# Altium PCB PCB_TX.PcbDoc
Units mil, origin at the board's own origin, x right, y up, seen from the top; angles counter-clockwise.
Board outline 2922.35 x 2276.76 mil, 2 copper layers (Top Layer, Bottom Layer); 93 components, 62 nets, 281 pads, 43 vias.
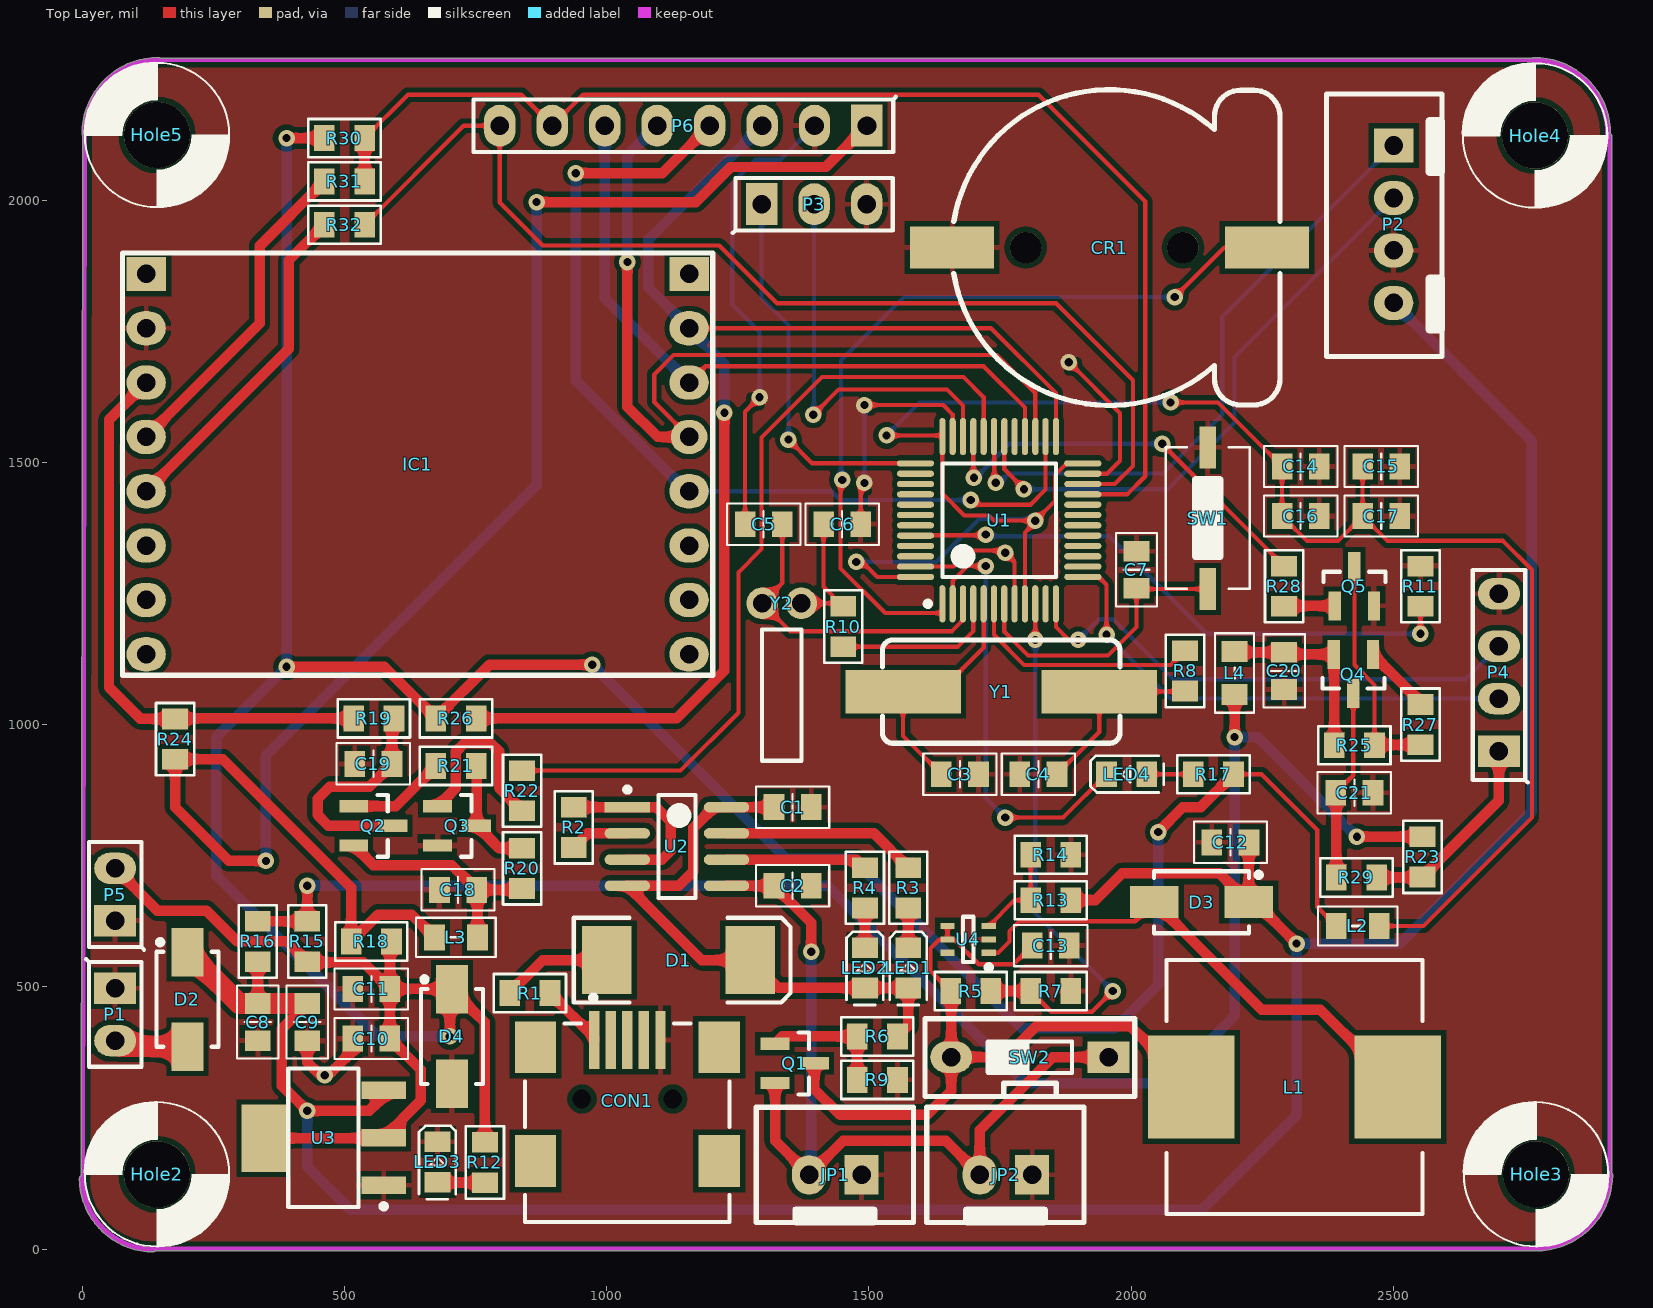
[diagram p0: Top Layer view]
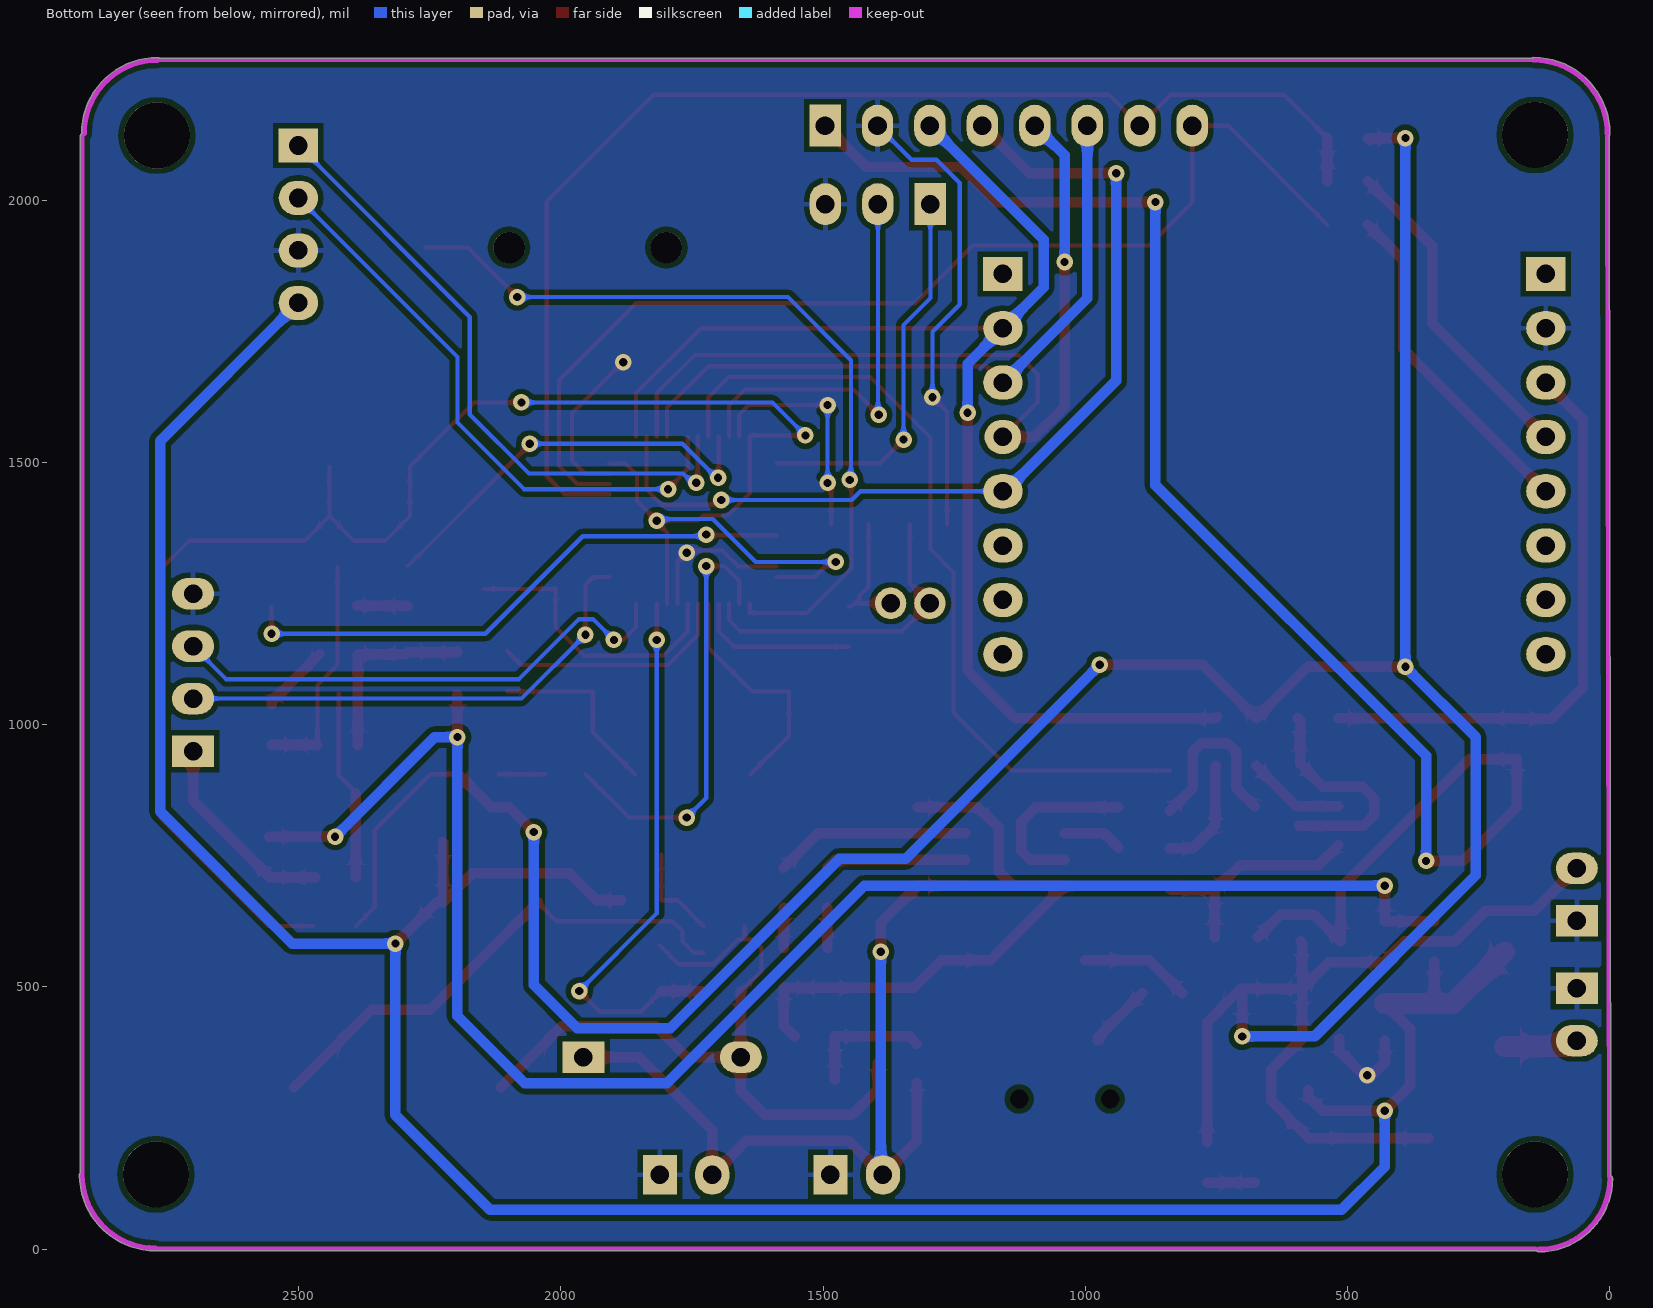
[diagram p1: Bottom Layer view, seen from below]
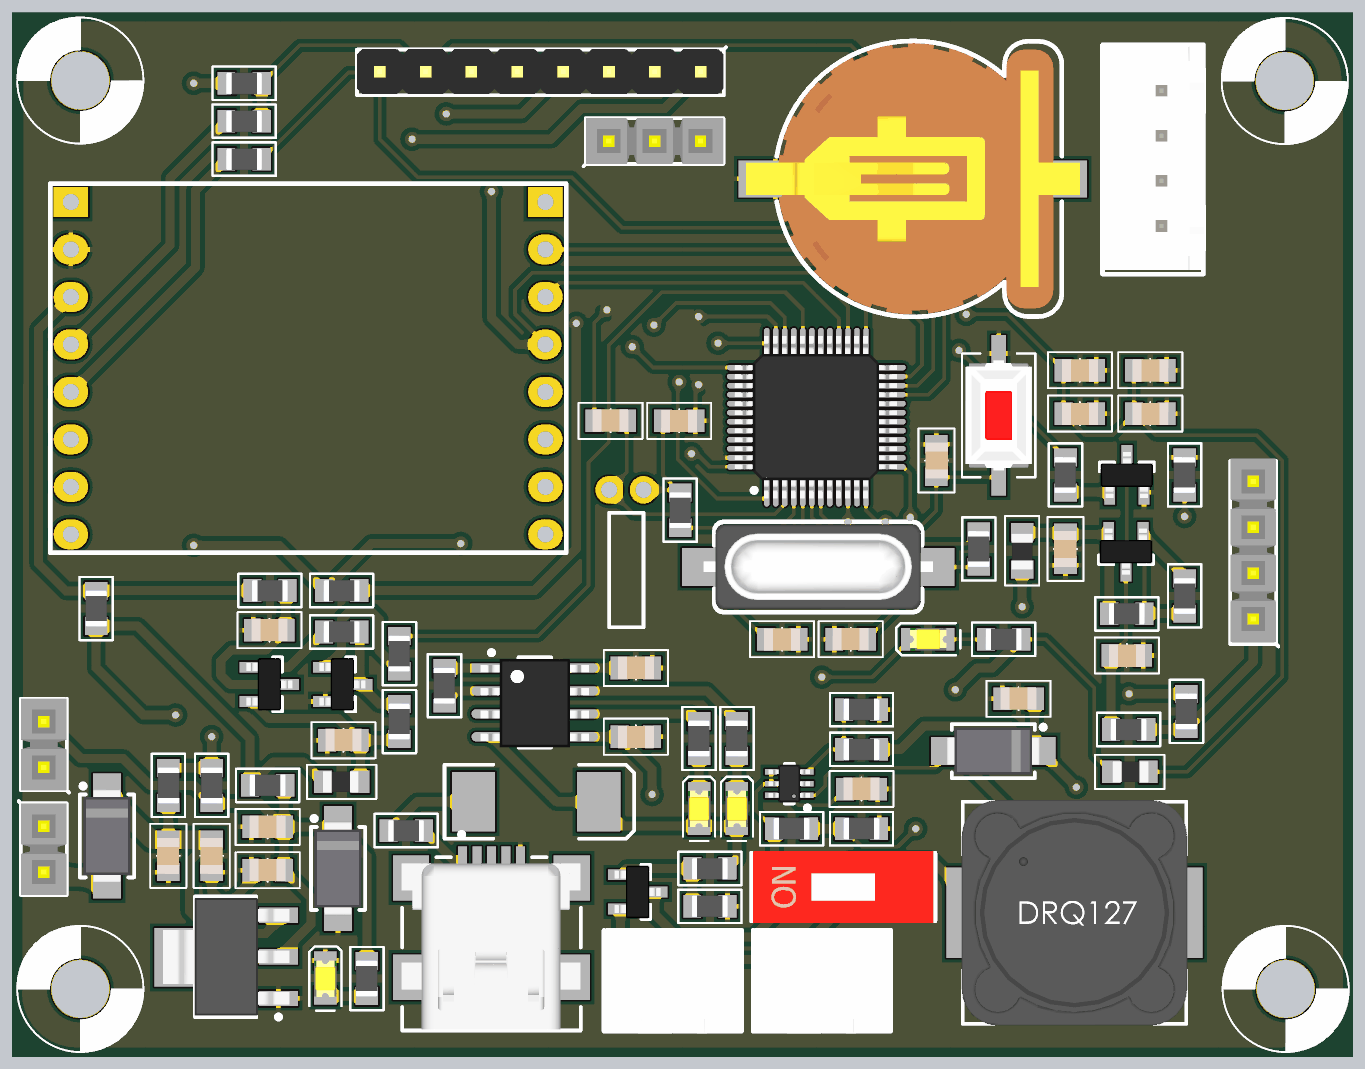
[diagram p2: 3D render of the assembled board from above, using the file's embedded part models]

## Layer stack, top to bottom
Top Solder: solder mask 0.4, Solder Resist, Dk 3.5
Top Layer: signal copper 1.4
Dielectric 1: dielectric 12.6, FR-4, Dk 4.8
Bottom Layer: signal copper 1.4
Bottom Solder: solder mask 0.4, Solder Resist, Dk 3.5

## Board outline
135,-5.01 cw(c135,135) -5.01,135 cw(c0,135) -2.05,139.58 0.91,2121.07 cw(c4.92,2121.06) 1.49,2123.15 cw(c5,2126.73) -0.01,2126.73 cw(c145,2126.73) 145,2271.75 cw(c145,2266.73) 148,2270.75 2765.57,2270.75 cw(c2768.46,2266.65) 2768.46,2271.67 cw(c2768.46,2126.65) 2913.48,2126.65 cw(c2908.46,2126.65) 2913.48,2126.48 cw(c2911.42,2123.03) 2915.43,2123.03 2915.43,145.9 cw(c2912.32,141.97) 2917.34,141.97 cw(c2772.32,141.97) 2772.32,-3.05 cw(c2772.32,1.97) 2771.86,-3.03 cw(c2771.65,0.98) 2771.65,-3.03 141.73,-3.03 cw(c141.73,0.98) 139.45,-2.32 cw(c135,0)

## Design rules (kind name [scope] priority, off if disabled: settings)
Clearance [All] p1: gap=10 ignorepadtopadclearanceinfootprint=FALSE except(0: Arc-Hole Track-Hole SMDPad-Hole THPad-Hole Via-Hole Fill-Hole Poly-Hole Region-Hole Text-Hole; 5: Arc-SMDPad Track-SMDPad SMDPad-SMDPad)
HoleSize [All] p1: absolutevalues=TRUE maxlimit=200 minlimit=1 maxpercent=80.000 minpercent=20.000
MinimumSolderMaskSliver [All] p1: minsoldermaskwidth=0
PolygonConnect [All] p1: thpad.connectstyle=Relief thpad.reliefconductorwidth=10 thpad.reliefentries=4 thpad.polygonreliefangle="90 Angle" thpad.airgapwidth=10 smdpad.connectstyle=Relief smdpad.reliefconductorwidth=10 smdpad.reliefentries=4 smdpad.polygonreliefangle="90 Angle" smdpad.airgapwidth=10 via.connectstyle=Direct via.reliefconductorwidth=10 via.reliefentries=4 via.polygonreliefangle="90 Angle" via.airgapwidth=10
RoutingVias [All] p1: holewidth=15.75 width=31.5 viastyle="Through Hole" minholewidth=15.75 minwidth=31.5 maxholewidth=15.75 maxwidth=31.5
SilkToSilkClearance [All] p1: silktosilkclearance=0
SilkToSolderMaskClearance [IsPad] p1: minsilkscreentomaskgap=0 clearancetoexposedcopper=TRUE
SolderMaskExpansion [All] p1: expansion=4
Width [All] p1: maxlimit=40 minlimit=8 preferedwidth=20
26 further rules are at their usual default settings.

## Components (designator, comment, footprint, x,y, rotation, side; value= is the part's Value field where it differs from the comment)
C1 "10uf" "C 0805 (2012)" 1354.39,842.72 r180 top
C2 "10uf" "C 0805 (2012)" 1354.39,692.91 r0 top
C3 "22pF" "C 0805 (2012)" 1673.29,905.51 r0 top
C4 "22pF" "C 0805 (2012)" 1822.9,905.51 r180 top
C5 "10pF" "C 0805 (2012)" 1299.28,1381.89 r180 top
C6 "10pF" "C 0805 (2012)" 1448.88,1381.89 r0 top
C7 "100nF" "C 0805 (2012)" 2009.91,1295.28 r90 top
C8 "10uF" "C 0805 (2012)" 334.71,433.07 r270 top
C9 "100nf" "C 0805 (2012)" 429.2,433.07 r270 top
C10 "10uF" "C 0805 (2012)" 551.24,401.57 r180 top
C11 "100nF" "C 0805 (2012)" 551.24,496.06 r180 top
C12 "10uf" "C 0805 (2012)" 2189.04,775.59 r180 top
C13 "10uf" "C 0805 (2012)" 1846.52,578.74 r180 top
C14 "100nF" "C 0805 (2012)" 2322.9,1492.13 r0 top
C15 "100nF" "C 0805 (2012)" 2476.44,1492.13 r0 top
C16 "100nF" "C 0805 (2012)" 2322.9,1397.64 r0 top
C17 "10uF" "C 0805 (2012)" 2476.44,1397.64 r0 top
C18 "10uf" "C 0805 (2012)" 716.6,685.04 r180 top
C19 "10uf" "C 0805 (2012)" 555.18,925.2 r180 top
C20 "10uf" "C 0805 (2012)" 2291.4,1102.36 r270 top
C21 "10uf" "C 0805 (2012)" 2425.26,870.08 r0 top
CON1 "USB mini B" "CON USB B Mini" 1039.43,283.46 r270 top
CR1 "" "CON CR1220" 2258.49,1909.45 r180 top
D1 "Diode" SMC 1136.87,551.18 r0 top
D2 "SS34" "DO-214AC (SMA)" 200.85,476.38 r90 top
D3 "SS34" "DO-214AC (SMA)" 2133.92,661.42 r0 top
D4 "SS14" "DO-214AC (SMA)" 704.79,405.51 r90 top
Hole2 "3mm" SCREW/3M/7M 142.72,142.72 r0 top
Hole3 "3mm" SCREW/3M/7M 2771.65,142.72 r0 top (schematic designator Hole2)
Hole4 "3mm" SCREW/3M/7M 2769.68,2123.03 r0 top (schematic designator Hole2)
Hole5 "3mm" SCREW/3M/7M 142.72,2124.02 r0 top (schematic designator Hole2)
IC1 "SX1278m" SX1287m -122.89,1269.17 r0 top
JP1 "JP2" "CON Header 2" 1285.89,141.73 r180 top value="Connector 2"
JP2 "JP2" "CON Header 2" 1611.09,141.73 r180 top value="Connector 2"
L1 "22uH" "Inductor SMD 12x12x8" 2311.09,309.06 r0 top
L2 "600 Ohm" "Inductor SMD 0805 (2012)" 2431.5,616.14 r180 top
L3 "Ferrite 80R" "Inductor SMD 0805 (2012)" 712.66,594.49 r0 top
L4 "Ferrite 80R" "Inductor SMD 0805 (2012)" 2196.91,1098.43 r90 top
LED1 "Led" "Led SMD 0805" 1574.87,535.43 r90 top
LED2 "Led" "Led SMD 0805" 1492.19,535.43 r90 top
LED3 "RedLed" "Led SMD 0805" 677.23,165.35 r90 top
LED4 "Blue Led" "Led SMD 0805" 1992.19,905.51 r180 top
P1 "Header 2" "Header 2" 63.06,497.64 r270 top
P2 "Header 4" "CON Header 4" 2529.06,1904.94 r270 top
P3 "Header 3" "Header 3" 1295.34,1992.13 r0 top
P4 "Header 4" "Header 4" 2700.85,949.61 r90 top
P5 "Header 2" "Header 2" 63.06,625.98 r90 top
P6 "Header 8" "Header 8" 1496.13,2141.73 r180 top
Q1 "FDN340P" SOT-23 1358.33,354.33 r0 top
Q2 "IRLML6402" SOT-23 555.18,807.09 r0 top
Q3 "2SC1815" SOT-23 714.63,807.09 r0 top
Q4 "IRLML6402" SOT-23 2423.29,1096.46 r270 top
Q5 "2SC1815" SOT-23 2425.26,1263.78 r90 top
R1 "0R" "R 0805 (2012)" 853.41,488.19 r0 top
R2 "1k2" "R 0805 (2012)" 937.07,804.13 r270 top
R3 "1k" "R 0805 (2012)" 1574.87,688.98 r270 top
R4 "1k" "R 0805 (2012)" 1492.19,688.98 r270 top
R5 "100k" "R 0805 (2012)" 1693.96,492.13 r180 top
R6 "10k" "R 0805 (2012)" 1515.81,405.51 r0 top
R7 "100k" "R 0805 (2012)" 1846.52,492.13 r180 top
R8 "330" "R 0805 (2012)" 2102.43,1102.36 r270 top
R9 "100k" "R 0805 (2012)" 1515.81,322.83 r180 top
R10 "0" "R 0805 (2012)" 1450.85,1187.01 r90 top
R11 "10k" "R 0805 (2012)" 2551.24,1263.78 r270 top
R12 "4k7" "R 0805 (2012)" 767.78,165.35 r270 top
R13 "220k" "R 0805 (2012)" 1846.52,665.35 r0 top
R14 "30k" "R 0805 (2012)" 1846.52,751.97 r180 top
R15 "R" "R 0805 (2012)" 429.2,586.61 r90 top
R16 "R" "R 0805 (2012)" 334.74,586.61 r90 top
R17 "2k2" "R 0805 (2012)" 2156.56,905.51 r0 top
R18 "R" "R 0805 (2012)" 551.24,586.61 r180 top
R19 "0" "R 0805 (2012)" 556.17,1011.81 r0 top
R20 "10k" "R 0805 (2012)" 838.65,725.98 r270 top
R21 "1k" "R 0805 (2012)" 712.66,921.26 r180 top
R22 "4k7" "R 0805 (2012)" 838.65,874.02 r270 top
R23 "0" "R 0805 (2012)" 2555.18,748.03 r270 top
R24 "0" "R 0805 (2012)" 177.23,972.44 r90 top
R25 "10k" "R 0805 (2012)" 2425.26,960.63 r180 top
R26 "10k" "R 0805 (2012)" 712.66,1011.81 r0 top
R27 "1k" "R 0805 (2012)" 2551.24,1000 r90 top
R28 "4k7" "R 0805 (2012)" 2291.4,1263.78 r270 top
R29 "0" "R 0805 (2012)" 2429.2,708.66 r0 top
R30 "10k" "R 0805 (2012)" 500.06,2118.11 r0 top
R31 "0" "R 0805 (2012)" 500.06,2035.43 r0 top
R32 "0" "R 0805 (2012)" 500.06,1952.76 r0 top
SW1 "Button" SW/2/SMD 2145.73,1393.7 r270 top
SW2 "SW DIP-1" SW/DIP1 1956.76,366.14 r90 top
U1 "STM32F103C8T6" LQFP48_N 1748.09,1389.76 r90 top
U2 "TP4056" SOIC-8 1133.92,767.72 r0 top
U3 "AMS1117-33" SOT-223 460.69,212.6 r180 top
U4 "MT3608" SOT-363-6 1689.04,590.55 r180 top
Y1 "8Mhz" "Crystal HC49US SMD" 1752.03,1062.99 r180 top
Y2 "32.768Khz" "Crystal DIP-2" 1396.13,1231.3 r270 top

## Footprints (in the part's own frame and the unit in brackets; to place one, negate y for a bottom-side part, rotate by r counter-clockwise, add the part's x,y. Pads: shape width x height; smd on the part's side, far side on the other; paste and mask are expansions set on the pad)
"C 0805 (2012)" [mm] "Chip Capacitor, 2-Leads, Body 2.0x1.3mm, IPC Medium Density"
  rect 1x1.25 smd: 1(-0.9,0) 2(0.9,0)
  silkscreen extent -1.78,-1 1.78,1, body extent -1,-0.64 1,0.61, height 0.6
"CON CR1220" [mil]
  rect 160x80 smd: 1(0,0) 2(600,0)
  round 60 hole 60: ""(160,0) ""(460,0)
  silkscreen extent -25,-301 597,301, body extent -64,-295 664,295, height 159
"CON Header 2" [mil]
  rect 65x75 hole 35.43: 1(-200,0)
  oval 65x75 hole 35.43: 2(-100,0)
  silkscreen extent -299,-129 1,96, body extent -297,-134 -2,94, height 286
"CON Header 4" [mil]
  rect 65x75 hole 35.43: 1(-199,-29)
  oval 65x75 hole 35.43: 2(-99,-29) 3(1,-29) 4(101,-29)
  silkscreen extent -297,-157 203,68, body extent -294,-162 195,64, height 290
"CON USB B Mini" [mm] "Connector; USB2.0, Type B, SM; 5 Position; Right Angle"
  rect 2.794x0.5 smd: 1(-2.927,-1.6) 2(-2.927,-0.8) 3(-2.927,0) 4(-2.927,0.8) 5(-2.927,1.6)
  rect 2.5x2 smd: 6(-2.573,4.45) 7(2.927,4.45) 8(-2.573,-4.45) 9(2.927,-4.45)
  round 0.6 hole 0.9 unplated: MH1(-0.073,2.2) MH2(-0.073,-2.2)
  silkscreen extent -5.11,-4.95 5.88,4.95, body extent -3.39,-4.98 5.81,4.92, height 4.17
"Crystal DIP-2" [mil] "Available for crystal 32.768kHz"
  round 60 hole 35.43: 1(0,-25) 2(0,-100)
  silkscreen extent 50,-100 300,-25, body extent 50,-105 300,-25
"Crystal HC49US SMD" [mil]
  rect 220.47x82.67 smd: 1(-187,0) 2(187,0)
  silkscreen extent -226,-98 226,98, body extent -250,-93 250,92, height 165
"DO-214AC (SMA)" [mm] "Molded Diode, 2-Leads, Body 4.3x2.7mm, IPC Medium Density"
  rect 2.35x1.55 smd: 1(-2.286,0) 2(2.286,0)
  silkscreen extent -2.3,-1.5 2.89,1.5, body extent -2.6,-1.3 2.6,1.3, height 2.4
"Header 2" [mil]
  rect 60x80 hole 35.43: 1(0,0)
  oval 60x80 hole 35.43: 2(100,0)
  silkscreen extent -55,-55 150,50, body extent -50,-50 150,50, height 350
"Header 3" [mil]
  rect 60x80 hole 35.43: 1(0,0)
  oval 60x80 hole 35.43: 2(100,0) 3(200,0)
  silkscreen extent -55,-55 250,50, body extent -50,-50 250,50, height 350
"Header 4" [mil]
  rect 60x80 hole 35.43: 1(0,0)
  oval 60x80 hole 35.43: 2(100,0) 3(200,0) 4(300,0)
  silkscreen extent -60,-55 345,50, body extent -50,-50 350,50, height 350
"Header 8" [mil]
  rect 60x80 hole 35.43: 1(0,0)
  oval 60x80 hole 35.43: 2(100,0) 3(200,0) 4(300,0) 5(400,0) 6(500,0) 7(600,0) 8(700,0)
  silkscreen extent -55,-55 750,50, body extent -50,-51 750,47, height 336
"Inductor SMD 12x12x8" [mm] "Precision Wire Wound Inductor, 2-Leads, Body 12.3x12.3mm, IPC Low Density"
  rect 4.2x5 smd: 1(-5,0) 2(5,0)
  silkscreen extent -6.2,-6.15 6.2,6.15, body extent -6.25,-6.25 6.25,6.25, height 8.01
"Inductor SMD 0805 (2012)" [mm] "Precision Wire Wound Inductor, 2-Leads, Body 2.0x1.2mm, IPC Medium Density"
  rect 1x1.25 smd: 1(-1.041,0) 2(1.041,0)
  silkscreen extent -1.92,-0.95 1.92,0.95, body extent -1.05,-0.6 0.95,0.6, height 0.95
"Led SMD 0805" [mm] "Led SMD 0805"
  rect 1x1.25 smd: 1(-0.95,0) 2(1,0)
  silkscreen extent -1.78,-0.89 1.78,0.89, body extent -1.01,-0.62 1.01,0.63, height 1.1
LQFP48_N [mm] "Thin QFP, 48-Leads, Body 7x7mm, Pitch 0.5mm, IPC Medium Density"
  oval 1.8x0.3 smd: 1(-4.05,2.75) 2(-4.05,2.25) 3(-4.05,1.75) 4(-4.05,1.25) 5(-4.05,0.75) 6(-4.05,0.25) 7(-4.05,-0.25) 8(-4.05,-0.75) 9(-4.05,-1.25) 10(-4.05,-1.75) 11(-4.05,-2.25) 12(-4.05,-2.75) 25(4.05,-2.75) 26(4.05,-2.25) 27(4.05,-1.75) 28(4.05,-1.25) 29(4.05,-0.75) 30(4.05,-0.25) 31(4.05,0.25) 32(4.05,0.75) 33(4.05,1.25) 34(4.05,1.75) 35(4.05,2.25) 36(4.05,2.75)
  oval 0.3x1.8 smd: 13(-2.75,-4.05) 14(-2.25,-4.05) 15(-1.75,-4.05) 16(-1.25,-4.05) 17(-0.75,-4.05) 18(-0.25,-4.05) 19(0.25,-4.05) 20(0.75,-4.05) 21(1.25,-4.05) 22(1.75,-4.05) 23(2.25,-4.05) 24(2.75,-4.05) 37(2.75,4.05) 38(2.25,4.05) 39(1.75,4.05) 40(1.25,4.05) 41(0.75,4.05) 42(0.25,4.05) 43(-0.25,4.05) 44(-0.75,4.05) 45(-1.25,4.05) 46(-1.75,4.05) 47(-2.25,4.05) 48(-2.75,4.05)
  silkscreen extent -4.17,-2.75 2.75,3.57, body extent -4.5,-4.47 4.5,4.53, height 1.6
"R 0805 (2012)" [mm] "Chip Resistor, 2-Leads, Body 2.0x1.3mm, IPC Medium Density"
  rect 1x1.25 smd: 1(-0.975,0) 2(0.975,0)
  silkscreen extent -1.75,-0.92 1.75,0.92, body extent -1,-0.61 1,0.59, height 0.5
SCREW/3M/7M [mm]
  round 3.2 hole 3.2: 1(0,0)
  silkscreen extent -3.54,-3.53 3.53,3.54
SMC [mm] "DO-214-AB/SMC; 2 C-Bend Leads; Body 7.9 x 5.9 mm, inc. leads (LxW)"
  rect 2.4x3.3 smd: 1(-3.475,0) 2(3.475,0)
  silkscreen extent -5.07,-2.05 5.43,2.05
SOIC-8 [mm] "SOIC, 8-Leads, Body 5.0x4.0mm (max), Pitch 1.27mm, IPC Medium Density"
  rect 2.2x0.51 smd: 1(-2.4,1.905)
  oval 2.2x0.51 smd: 2(-2.4,0.635) 3(-2.4,-0.635) 4(-2.4,-1.905) 5(2.4,-1.905) 6(2.4,-0.635) 7(2.4,0.635) 8(2.4,1.905)
  silkscreen extent -2.52,-2.5 0.9,2.88, body extent -3,-2.49 3,2.41, height 1.75
SOT-23 [mm] "SOT23, 3-Leads, Body 3.0x2.5mm (max), Pitch 0.95mm, IPC Medium Density"
  rect 1.4x0.6 smd: 1(-0.95,0.95) 2(-0.95,-0.95) 3(0.95,0)
  silkscreen extent 0.2,-1.5 0.7,1.5, body extent -1.28,-1.46 1.27,1.46, height 0.95
SOT-223 [mm] "SOT223, 4-Leads, Body 6.7x7.3mm (max), Pitch 2.30mm, IPC Medium Density"
  rect 2.15x0.85 smd: 1(-2.899,2.3) 2(-2.899,0) 3(-2.899,-2.3)
  rect 2.15x3.25 smd: 4(2.899,0.025)
  silkscreen extent -3.02,-3.35 1.72,3.45, body extent -3.51,-3.25 3.49,3.25, height 1.64
SOT-363-6 [mm] "SOT363 (SC-88, SC-70-6), 6-Leads, Body 2.2x2.2mm (max), Pitch 0.65mm, IPC Medium Density"
  rect 0.7x0.3 smd: 1(-1,0.65) 2(-1,0) 3(-1,-0.65) 4(1,-0.65) 5(1,0) 6(1,0.65)
  silkscreen extent -1.13,-1.1 0.25,1.47, body extent -1.15,-1.05 1.15,1.05, height 1
SW/2/SMD [mil]
  rect 80x31.5 smd: 1(-135,0) 2(135,0)
  silkscreen extent -135,-80 135,80, body extent -120,-73 120,73, height 98
SW/DIP1 [mil]
  rect 60x80 hole 35.43: 1(0,0)
  oval 60x80 hole 35.43: 2(0,300)
  silkscreen extent -75,-50 73,350, body extent -80,-47 77,347, height 269
SX1287m [mil] "SX1287 Module"
  oval 75x65 hole 35.43: 0(245,-135) 1(245,-31.43) 2(245,72.14) 3(245,175.71) 4(245,279.29) 5(245,382.86) 6(245,486.43) 8(1280,-135) 9(1280,-31.43) 10(1280,72.14) 11(1280,175.71) 13(1280,382.86) 14(1280,486.43)
  rect 75x65 hole 35.43: 7(245,590) 15(1280,590)
  oval 70x65 hole 35.43: 12(1280,279.29)
  silkscreen extent 200,-175 1325,630, body extent 195,-180 1330,635, height 10

## Part data
C1 C2 C3 C4 C5 C6 C7 C8 C9 C10 C11 C12 C13 C14 C15 C16 C17 C18 C19 C20 C21: library part "Capacitor NP", "Capacitor non-pol"
CON1: library part "CON USB mini B", "USB mini type B, 5 pins"
CR1: library part Battery
D1: "Default Diode", Code_JEDEC=DO-214-AB, LatestRevisionDate=17-Jul-2002, LatestRevisionNote="Re-released for DXP Platform.", PackageDescription="DO-214-AB/SMC; 2 C-Bend Leads; Body 7.9 x 5.9 mm, inc. leads (LxW)", PackageReference=SMC, PackageVersion=Sep-1996, Published=8-Jun-2000, Publisher="Altium Limited"
D2 D3: library part "Diode Schottky", "Schottky Diode", Code_JEDEC=DO-214-AA, LatestRevisionDate=17-Jul-2002, LatestRevisionNote="Re-released for DXP Platform.", PackageReference=SMB, Published=8-Jun-2000, Publisher="Altium Limited"
D4: library part Diode, "Default Diode", Code_JEDEC=DO-214-AB, LatestRevisionDate=17-Jul-2002, LatestRevisionNote="Re-released for DXP Platform.", PackageReference=SMC, PackageVersion=Sep-1996, Published=8-Jun-2000, Publisher="Altium Limited"
Hole2 Hole3 Hole4 Hole5: library part Screw
IC1: "SX1278 - Module LoRa"
JP1 JP2: library part Con2, "Connector 2"
L1 L2: library part Inductor, "Inductor"
L3 L4: library part Inductor, "Ferrite"
LED1 LED2: "Typical LED"
LED3 LED4: library part Led, "Typical LED"
P1 P5: "Header, 2-Pin", LatestRevisionDate=17-Jul-2002, LatestRevisionNote="Re-released for DXP Platform.", Publisher="Altium Limited"
P2 P4: "Header, 4-Pin"
P3: "Header, 3-Pin"
P6: "Header, 8-Pin", LatestRevisionDate=17-Jul-2002, LatestRevisionNote="Re-released for DXP Platform.", Publisher="Altium Limited"
Q1 Q2 Q4: library part "MOSFET P-Channel", "MOSFET P-Channel"
Q3 Q5: library part "Transistor NPN", "NPN Bipolar Transistor"
R1 R2 R3 R4 R5 R6 R7 R8 R9 R10 R11 R12 R13 R14 R15 R16 R17 R18 R19 R20 R21 R22 R23 R24 R25 R26 R27 R28 R29 R30 R31 R32: library part Resistor, "Resistor", LatestRevisionDate=17-Jul-2002, LatestRevisionNote="Re-released for DXP Platform.", PackageReference=AXIAL-0.3, Published=8-Jun-2000, Publisher="Altium Limited"
SW1: library part "SW SPST", "Tact switch 2 pin"
U1: "STM32 ARM-based 32-bit MCU with 64 Kbytes Flash, 48-pin LQFP, Industrial Temperature", ComponentLink1Description="Manufacturer Link", ComponentLink1URL=www.st.com/stm32, ComponentLink2Description=Datasheet, ComponentLink2URL=http://www.st.com/stonline/products/literature/ds/13587.pdf, DatasheetVersion="rev6, Mar-2008", PackageDescription="48-Pin Low-Profile Quad Flat Pack, 7 x 7 mm Body, 0.5 mm Pitch (LQFP48)", PackageReference=LQFP48, PackageVersion=Mar-2008, Published=30-May-2008, Publisher="Altium Limited"
U2: "1A Standalone Linear Li-lon Battery Charger with Thermal  Regulation"
U3: library part AMS1117, "1A LDO Voltage Regulator, ADJ or fixed 1.5/1.8/2.5/2.85/3.3/5V"
Y1 Y2: library part Crystal

## Via types
v1: diameter 31.5, hole 15.75, Top Layer to Bottom Layer, tented both sides, 43 vias

## Nets (pads, with @x,y where several pads share a name; then routed paths per layer and width w, separated by ;. In a path a pad name is that pad's centre, name@x,y a point inside that pad or via, vN(x,y) a via of type N, cw(c..) or ccw(c..) an arc to the next point about the centre after c; other vN are vias at no path point)
3V3: C10.1 C11.1 D4.2 L2.2 P5.2 R12.1 R15.1 R17.2 R18.1 R26.1 R30.1 U3.2 U3.4 | length 6861
  Top Layer w8: R17.2 2248.09,905.51 2354.39,799.21 2354.39,652.25 L2.2
  Top Layer w20: P5.2 143.37,645.67 236.28,645.67 295.34,586.61 390.81,586.61 R15.1 430.42,547.01 535.73,547.01 C11.1 ; U3.4 573.83,211.6 U3.2 645.73,283.5 645.73,342.52 C10.1 C11.1 ; v1(389.83,1110.24) 575.85,1110.24 R26.1 776.64,1114.17 v1(972.5,1114.17) ; v1(389.83,2118.11) 453.8,2118.11 457.74,2114.17 R30.1 ; R18.1 586.68,583.66 C11.1 ; v1(700.85,405.51) 700.85,492.68 D4.2@704.24,496.06 ; R12.1 767.78,432.52 D4.2 D4.2@704.24,496.06 ; v1(2051.24,795.28) 2098.49,842.52 2131.95,842.52 R17.2 ; C11.1 D4.2@704.24,496.06
  Bottom Layer w20: v1(389.83,2118.11) v1(389.83,1110.24) 255.97,976.38 255.97,712.6 563.06,405.51 v1(700.85,405.51) ; v1(972.5,1114.17) 1342.58,744.09 1468.57,744.09 1791.4,421.26 1968.57,421.26 2051.24,503.94 v1(2051.24,795.28)
+5V: C1.2 D1.2 LED1.1 LED2.1 R6.2 U2.4 U2.8 | length 1107.3
  Top Layer w20: C1.2 U2.8 1204.98,842.72 1165.42,803.15 1165.42,720.47 1137.66,692.72 U2.4 1180.97,551.18 D1.2 1326.82,498.05 LED2.1 LED1.1 1574.87,426.18 R6.2
BAT+: C2.1 JP1.2 JP2.2 Q1.2 SW2.1 U2.5 | length 1642.4
  Top Layer w20: U2.5 1318.76,692.72 C2.1 1389.83,622.05 v1(1389.83,566.93) ; Q1.2 1320.93,206.69 JP1.2 1450.85,206.69 1646.13,206.69 JP2.2 1711.09,226.77 1850.46,366.14 SW2.1
  Bottom Layer w20: JP1.2 1389.83,145.67 v1(1389.83,566.93)
DEBUG_LED: LED4.2 U1.2 | length 840.2
  Top Layer w8: U1.2 1659.51,1273.85 1687.83,1302.17 v1(1722.53,1302.17) ; v1(1759.91,822.83) 1870.13,822.83 LED4.2
  Bottom Layer w8: v1(1722.53,1302.17) 1722.53,860.22 v1(1759.91,822.83)
GND: C1.1 C2.2 C3.2 C4.2 C5.2 C6.2 C7.2 C8.2 C9.2 C10.2 C11.2 C12.2 C13.1 C14.2 C15.2 C16.2 C17.2 C18.2 C19.2 C20.2 C21.2 CON1.5 CR1.2 D4.1 IC1.6 JP1.1 JP2.1 LED3.2 P1.1 P2.3 P3.3 P4.4 P5.1 P6.2 Q3.2 Q5.2 R7.1 R9.1 R11.1 R14.1 SW1.1 U1.8 U1.23 U1.35 U1.47 U3.1 U4.2 | length 2114.7
  Top Layer w8: C5.2 1263.84,1596.46 v1(1291.4,1624.02) ; C6.2 1484.31,1453.8 v1(1491.21,1460.7) ; v1(1491.2,1609.25) 1641.57,1609.25 1659.51,1591.32 U1.35 ; U1.47 1661.39,1301.18 1692.12,1331.91 1755.75,1331.91 v1(1759.91,1327.76) 1777.62,1310.04 U1.8 ; v1(1880.97,1690.94) 1978.41,1593.5 1978.41,1502.95 1953.8,1478.35 U1.23
  Top Layer w20: C9.2 429.2,356.3 453.8,331.69 v1(462.66,331.69) 469.55,331.69 515.81,377.95 C10.2
  Bottom Layer w8: v1(1291.4,1624.02) 1291.4,1749.02 1239.24,1801.18 1239.24,2032.48 1283.53,2076.77 1331.17,2076.77 P6.2 ; v1(1491.21,1460.7) v1@1491.21,1609.24
GPS_Power: R28.1 U1.33 | length 796.2
  Top Layer w8: U1.33 1698.88,1475.5 1701.78,1472.6 1699.95,1470.77 v1(1699.95,1470.54) ; v1(2059.12,1535.43) 2059.12,1534.45 R28.1
  Bottom Layer w8: v1(1699.95,1470.54) 1703.19,1470.54 1768.08,1535.43 v1(2059.12,1535.43)
LoRa_Inter: P6.8 R32.2 U1.22 | length 2102.8
  Top Layer w8: R32.2 727.43,2141.73 P6.8 796.13,1995.28 878.02,1913.39 1214.63,1913.39 1324.87,1803.15 1856.36,1803.15 2003.02,1656.5 2003.02,1493.11 1968.57,1458.66 U1.22
LoRa_Power: R22.1 U1.32 | length 1562.6
  Top Layer w8: R22.1 1140.81,912.4 1251.05,1022.64 1251.05,1290.35 1295.34,1334.65 1295.34,1547.24 1410.5,1662.4 1680.18,1662.4 1718.57,1624.02 U1.32
LoRa_Reset: P6.7 R30.2 R31.2 U1.21 | length 2395.4
  Top Layer w8: R30.2 621.13,2200.79 837.07,2200.79 P6.7 955.18,2200.79 1822.9,2200.79 2026.64,1997.05 2026.64,1473.43 1992.19,1438.98 U1.21
  Top Layer w20: R31.2 R30.2
NetC3_1: C3.1 U1.5 Y1.2 | length 459.5
  Top Layer w8: C3.1 1565.03,978.34 Y1.2 1634.91,1062.99 1718.57,1146.65 U1.5
NetC4_1: C4.1 R8.2 Y1.1 | length 354.7
  Top Layer w8: C4.1 1939.03,986.21 Y1.1 2101.44,1062.99 R8.2
NetC5_1: C5.1 U1.3 Y2.2 | length 611.4
  Top Layer w8: C5.1 1334.71,1269.88 Y2.2 1349.28,1178.15 1657.95,1178.15 1674.42,1194.61 1674.42,1194.98 1679.2,1199.76 U1.3
NetC6_1: C6.1 R10.2 Y2.1 | length 243.8
  Top Layer w8: Y2.1 R10.2@1440.02,1231.3 ; C6.1 1413.45,1262.8 1430.24,1246 1430.24,1241.08 R10.2@1440.02,1231.3 ; R10.2 1445.93,1225.39 R10.2@1440.02,1231.3
NetC7_1: C7.1 SW1.2 U1.7 | length 556.5
  Top Layer w8: U1.7 1757.94,1177.03 1803.3,1131.67 1955.33,1131.67 2009.91,1186.24 C7.1 2011.05,1258.7 SW1.2
NetC18_1: C18.1 L3.2 Q2.2 R20.2 | length 448.2
  Top Layer w20: Q2.2 555.18,732.28 704.79,732.28 C18.1 ; L3.2 753.66,683.41 C18.1 ; R20.2 836.09,685.04 C18.1
NetC19_1: C19.1 Q2.3 R19.2 | length 440.6
  Top Layer w20: Q2.3 469.55,807.09 448.88,827.76 448.88,858.46 472.31,881.89 547.31,881.89 C19.1 590.61,1007.87 R19.2
NetC20_1: C20.1 L4.2 Q4.2 R25.2 | length 364.9
  Top Layer w20: L4.2 2198.54,1137.8 C20.1 2295.34,1133.86 Q4.2 2386.87,1132.87 R25.2
NetC21_1: C21.1 Q4.3 R29.1 | length 364.7
  Top Layer w8: C21.1@2390.81,869.09 C21.1 2423.29,903.54 Q4.3
  Top Layer w20: R29.1 C21.1@2390.81,869.09
NetCON1_1: CON1.1 R1.2 | length 124.5
  Top Layer w20: R1.2 976.44,403.54 CON1.1
NetD1_1: D1.1 R1.1 | length 211.1
  Top Layer w20: R1.1 878.02,551.18 D1.1
NetD2_1: D2.1 P1.2 | length 142.5
  Top Layer w40: P1.2 74.31,386.38 D2.1
NetD3_1: D3.1 L1.2 U4.1 | length 977
  Top Layer w8: U4.1 1746.13,564.96 1767.78,586.61 1767.78,606.3 1786.48,625 2007.5,625 D3.1
  Top Layer w20: D3.1 2248.65,456.69 2360.3,456.69 L1.2
NetIC1_3: IC1.3 R32.1 | length 648.5
  Top Layer w20: IC1.3 393.76,1716.54 393.76,1884.84 R32.1
NetIC1_4: IC1.4 R31.1 | length 627.6
  Top Layer w20: IC1.4 338.65,1764.99 338.65,1912.4 R31.1
NetIC1_5: IC1.5 R19.1 R24.2 | length 1102.3
  Top Layer w20: IC1.5 51.24,1581.16 51.24,1070.87 111.28,1010.83 R24.2 178.21,1011.81 R19.1
NetLED1_2: LED1.2 R3.2 | length 75.8
  Top Layer w20: LED1.2 R3.2
NetLED2_2: LED2.2 R4.2 | length 75.8
  Top Layer w20: LED2.2 R4.2
NetLED3_1: LED3.1 R12.2 | length 91
  Top Layer w20: LED3.1 678.23,126.97 R12.2
NetLED4_1: LED4.1 R17.1 | length 88.6
  Top Layer w8: LED4.1 R17.1
NetP4_1: P4.1 R23.2 R29.2 | length 388.3
  Top Layer w20: R29.2 2554.2,708.66 R23.2 2700.85,855.31 P4.1
NetQ1_1: Q1.1 R6.1 R9.2 | length 244.9
  Top Layer w20: Q1.1 1334.71,405.51 R6.1 R9.2
NetQ2_1: Q2.1 R21.2 | length 188.3
  Top Layer w20: Q2.1 597.5,844.49 R21.2
NetQ3_1: Q3.1 R22.2 | length 345.5
  Top Layer w20: Q3.1 712.66,879.92 712.66,948.82 728.41,964.57 779,964.57 794.75,948.82 794.75,879.53 R22.2
NetQ3_3: Q3.3 R20.1 R21.1 | length 218.9
  Top Layer w20: R21.1 752.03,920.28 Q3.3 794.75,764.37 R20.1
NetQ4_1: Q4.1 R27.2 | length 133
  Top Layer w20: Q4.1 2551.24,1043.31 R27.2
NetQ5_1: Q5.1 R28.2 | length 96.9
  Top Layer w20: R28.2 2292.39,1226.38 Q5.1
NetQ5_3: Q5.3 R25.1 R27.1 | length 444.5
  Top Layer w8: Q5.3 2425.26,1114.17 2463.65,1075.79 R25.1
  Top Layer w20: R25.1 2464.63,961.61 R27.1
NetR2_1: R2.1 U2.1 U2.3 | length 341.5
  Top Layer w20: R2.1 1039.24,842.52 U2.1 1094.35,842.72 1122.11,814.96 1122.11,759.84 1104.98,742.72 U2.3
NetR2_2: R2.2 U2.2 | length 113.5
  Top Layer w20: R2.2 964.04,792.72 U2.2
NetR3_1: R3.1 U2.7 | length 373.5
  Top Layer w20: U2.7 1509.51,792.72 R3.1
NetR4_1: R4.1 U2.6 | length 270.1
  Top Layer w20: U2.6 1476.83,742.72 R4.1
NetR8_1: R8.1 U1.6 | length 458.3
  Top Layer w8: U1.6 1738.25,1171.26 1795.84,1113.67 2075.35,1113.67 R8.1
NetR10_1: R10.1 U1.4 | length 312.4
  Top Layer w8: R10.1 1669.35,1148.62 1698.88,1178.15 U1.4
NetR11_2: R11.2 U1.44 | length 1093.9
  Top Layer w8: U1.44 1589.37,1360.97 1721.22,1360.97 v1(1722.53,1362.27) ; v1(2551.24,1173.23) R11.2
  Bottom Layer w8: v1(1722.53,1362.27) 1725.7,1359.1 1958.03,1359.1 2143.9,1173.23 v1(2551.24,1173.23)
NetR13_1: R13.1 R14.2 U4.3 | length 186.7
  Top Layer w8: U4.3 1777.62,665.35 R13.1 R14.2
SPI_MISO: IC1.12 P6.5 U1.27 | length 1701.9
  Top Layer w8: IC1.12 1090.61,1614.95 1090.61,1667.72 1127.62,1704.72 1744.16,1704.72 1816.99,1631.89 U1.27
  Top Layer w20: v1(1039.43,1881.89) 1039.43,1606.3 1097.28,1548.45 IC1.12
  Bottom Layer w20: v1(1039.43,1881.89) 1039.43,2085.04 P6.5
SPI_MOSI: IC1.13 P6.6 U1.28 | length 1297.2
  Top Layer w8: IC1.13 1188.16,1683.07 1718.57,1683.07 1797.31,1604.33 U1.28
  Bottom Layer w20: P6.6 996.13,1813.01 IC1.13
SPI_NSS: IC1.14 P6.3 R26.2 U1.25 | length 2538
  Top Layer w8: IC1.14 1732.66,1755.6 1856.36,1631.89 U1.25
  Top Layer w20: R26.2@748.09,1014.76 R26.2 1133.92,1011.81 1224.47,1102.36 v1(1224.47,1594.49)
  Bottom Layer w20: v1(1224.47,1594.49) 1224.47,1688.23 IC1.14 1078.8,1833.9 1078.8,1924.41 P6.3
SPI_SCK: IC1.11 P6.4 U1.26 | length 1794.8
  Top Layer w8: v1(1693.98,1428.22) 1703.13,1419.07 1807.66,1419.07 1836.68,1448.09 U1.26
  Top Layer w20: v1(941.01,2051.18) 1105.57,2051.18 P6.4
  Bottom Layer w8: IC1.11 1428.47,1444.88 1445.13,1428.22 v1(1693.98,1428.22)
  Bottom Layer w20: v1(941.01,2051.18) 941.01,1655.98 1152.11,1444.88 IC1.11
SWCLK: P3.1 U1.37 | length 730.9
  Top Layer w8: v1(1346.52,1543.31) 1391.57,1498.25 1588.43,1498.25 U1.37
  Bottom Layer w8: P3.1 1295.34,1812.99 1346.52,1761.81 v1(1346.52,1543.31)
SWDIO: P3.2 U1.34 | length 779.5
  Top Layer w8: v1(1393.76,1590.55) 1442.21,1639 1648.46,1639 1679.2,1608.27 U1.34
  Bottom Layer w8: v1(1393.76,1590.55) 1395.34,1592.13 P3.2
USART1_RX: P2.1 U1.31 | length 1223
  Top Layer w8: U1.31 1738.76,1548.71 1738.76,1463.83 v1(1741.44,1461.14)
  Bottom Layer w8: v1(1741.44,1461.14) 1749.54,1461.14 1766.97,1478.57 2060.32,1478.57 2173.29,1591.54 2173.29,1777.17 P2.1
USART1_TX: P2.2 U1.30 | length 1123.8
  Top Layer w8: U1.30 1757.94,1486.72 1795.34,1449.32 v1(1795.34,1448.82)
  Bottom Layer w8: v1(1795.34,1448.82) 2069.94,1448.82 2196.91,1575.79 2196.91,1700.79 P2.2
USART2_RX: P4.2 U1.13 | length 945.3
  Top Layer w8: U1.13 1938.06,1281.5 1952.85,1266.7 v1(1952.85,1171.26)
  Bottom Layer w8: v1(1952.85,1171.26) 2074.5,1049.61 P4.2
USART2_TX: P4.3 U1.12 | length 988.8
  Top Layer w8: U1.12 1856.36,1185.96 1880.85,1161.47 v1(1898.62,1161.47)
  Bottom Layer w8: v1(1898.62,1161.47) 1938.16,1201.01 1965.17,1201.01 2079.57,1086.61 2637.86,1086.61 P4.3
VBAT: CR1.1 U1.1 | length 1546.6
  Top Layer w8: v1(1448.88,1466.54) 1445.95,1463.6 1445.95,1297.72 1531.07,1212.6 1639.61,1212.6 1639.83,1212.82 U1.1 ; v1(2082.74,1814.96) 2177.23,1909.45 CR1.1
  Bottom Layer w8: v1(1448.88,1466.54) 1446.69,1468.72 1446.69,1694.66 1566.99,1814.96 v1(2082.74,1814.96)
VCC: C8.1 C9.1 C12.1 D2.2 D3.2 P2.4 R13.2 R16.1 U3.3 | length 5443.2
  Top Layer w20: C8.1 R16.1 ; C9.1 380.97,420.28 380.97,312.01 v1(429.2,263.78) 547.31,263.78 574.83,291.31 U3.3 ; R13.2 1931.56,665.35 1982.74,716.54 2168.8,716.54 D3.2 ; C12.1 2223.92,775.04 D3.2 ; v1(2315.02,582.68) 2236.28,661.42 D3.2
  Top Layer w40: D2.2 298.72,468.5 C8.1 C9.1
  Bottom Layer w20: v1(429.2,263.78) 429.2,157.48 511.87,74.8 2133.92,74.8 2315.02,255.91 v1(2315.02,582.68) 2511.87,582.68 2763.84,834.65 2763.84,1540.16 P2.4
VDD: C14.1 C15.1 C16.1 C17.1 L2.1 U1.9 U1.24 U1.36 U1.48 | length 3682.5
  Top Layer w8: v1(1475.7,1310.04) 1487.27,1310.04 1515.81,1281.5 U1.48 ; v1(1533.53,1551.18) 1637.86,1551.18 U1.36 1639.83,1440.3 1681.66,1398.47 1728.39,1398.47 1738.02,1388.85 v1(1817.02,1388.85) ; U1.9 1797.31,1366.26 1817.02,1385.97 v1(1817.02,1388.85) ; U1.24 1876.98,1498.03 1872.2,1493.25 1871.84,1493.25 1854.68,1476.09 1854.68,1426.51 v1(1817.02,1388.85) ; v1(2074.87,1614.17) 2165.42,1614.17 C14.1 C16.1 2334.71,1350.39 2393.76,1350.39 C17.1 ; C15.1 C17.1 ; L2.1 2557.15,616.14 2763.84,822.83 2763.84,1295.28 2708.72,1350.39 2488.25,1350.39 C17.1
  Bottom Layer w8: v1(1475.7,1310.04) 1628.22,1310.04 1710.2,1392.02 1813.85,1392.02 v1(1817.02,1388.85) ; v1@1525.26,1551.18 v1(1533.53,1551.18) 1596.52,1614.17 v1(2074.87,1614.17)
VGPS: L4.1 R15.2 R16.2 R23.1 | length 3189
  Top Layer w20: R16.2 R15.2 v1(429.2,692.91) ; v1(2196.91,976.38) L4.1 ; v1(2430.18,786.42) R23.1
  Bottom Layer w20: v1(429.2,692.91) 1421.32,692.91 1798.09,316.14 2068.17,316.14 2196.91,444.88 v1(2196.91,976.38) 2240.22,976.38 v1(2430.18,786.42)
VIN: C13.2 L1.1 Q1.3 R5.2 SW2.2 U4.4 U4.5 | length 1428.4
  Top Layer w8: U4.4 U4.5 ; R5.2 1617.19,530.51 1617.19,573.82 1633.92,590.55 U4.5 ; C13.2 1775.65,543.31 1709.16,543.31 1661.92,590.55 U4.5
  Top Layer w20: Q1.3 1395.73,305.12 1444.94,255.91 1610.3,255.91 1656.76,302.36 SW2.2 ; R5.2 1656.76,490.94 SW2.2 ; L1.1 1998.09,425.2 1818.96,425.2 1759.91,366.14 SW2.2
VIN_ADC: R5.1 R7.2 U1.10 | length 1064.2
  Top Layer w8: R7.2 1847.5,452.76 1925.26,452.76 v1(1964.63,492.13) ; U1.10 1817.08,1230.23 v1(1817.08,1161.47)
  Top Layer w20: R5.1 R7.2
  Bottom Layer w8: v1(1817.08,1161.47) 1817.08,639.68 v1(1964.63,492.13)
VLORA: L3.1 P6.1 R18.2 R24.1 | length 3204.4
  Top Layer w20: v1(350.46,740.16) 279.59,740.16 177.23,842.52 R24.1 267.78,934.06 512.86,688.98 R18.2 564.04,637.8 628.35,637.8 L3.1 ; v1(866.2,1996.06) 1169.35,1996.06 1236.28,2062.99 1417.39,2062.99 P6.1
  Bottom Layer w20: v1(350.46,740.16) 350.46,940.94 866.2,1456.69 v1(866.2,1996.06)
pads on no net: CON1.2 CON1.3 CON1.4 CON1.6 CON1.7 CON1.8 CON1.9 CON1.MH1 CON1.MH2 CR1. Hole2.1 Hole3.1 Hole4.1 Hole5.1 IC1.0 IC1.1 IC1.2 IC1.7 IC1.8 IC1.9 IC1.10 IC1.15 U1.11 U1.14 U1.15 U1.16 U1.17 U1.18 U1.19 U1.20 U1.29 U1.38 U1.39 U1.40 U1.41 U1.42 U1.43 U1.45 U1.46 U4.6

## Polygon pours and split planes (outlines as drawn)
GND on Bottom Layer (solid, pour order 18): 0,0 0,2261.81 4.92,2266.73 5,2266.65 2911.42,2266.65 2911.42,1.97 2909.45,0
GND on Bottom Layer "Bottom Layer-GND 1" (solid, pour order 6): 0,2.95
GND on Top Layer (solid, pour order 20): 0,2252.95 13.78,2266.73 2908.46,2266.73 2908.46,3.94 0,3.94

## Keep-outs
Keep-Out Layer:
  lines w8: 1.97,138.78 4.92,2121.06 ; 141.73,0.98 2771.65,0.98 ; 142,2266.73 2769.69,2266.73 ; 2911.42,143.7 2911.42,2123.03
  lines w10: 0,135 ccw(c135,135) 135,0 ; 5,2126.73 cw(c145,2126.73) 145,2266.73 ; 2768.46,2266.65 cw(c2768.46,2126.65) 2908.46,2126.65 ; 2772.32,1.97 ccw(c2772.32,141.97) 2912.32,141.97

## Text inside footprints (layer, text, board x,y; h text height)
CON1: Mechanical 1 "PCB Edge" at 880.52,62.63 h9.84